# Altium PCB SiPMSensorPCB.PcbDoc
Units mil, origin at the board's own origin, x right, y up, seen from the top; angles counter-clockwise.
Board outline 6000 x 4000 mil, 2 copper layers (Top Layer, Bottom Layer); 19 components, 19 nets, 195 pads, 0 vias.
Unrouted connection lines stored in the file: 82.
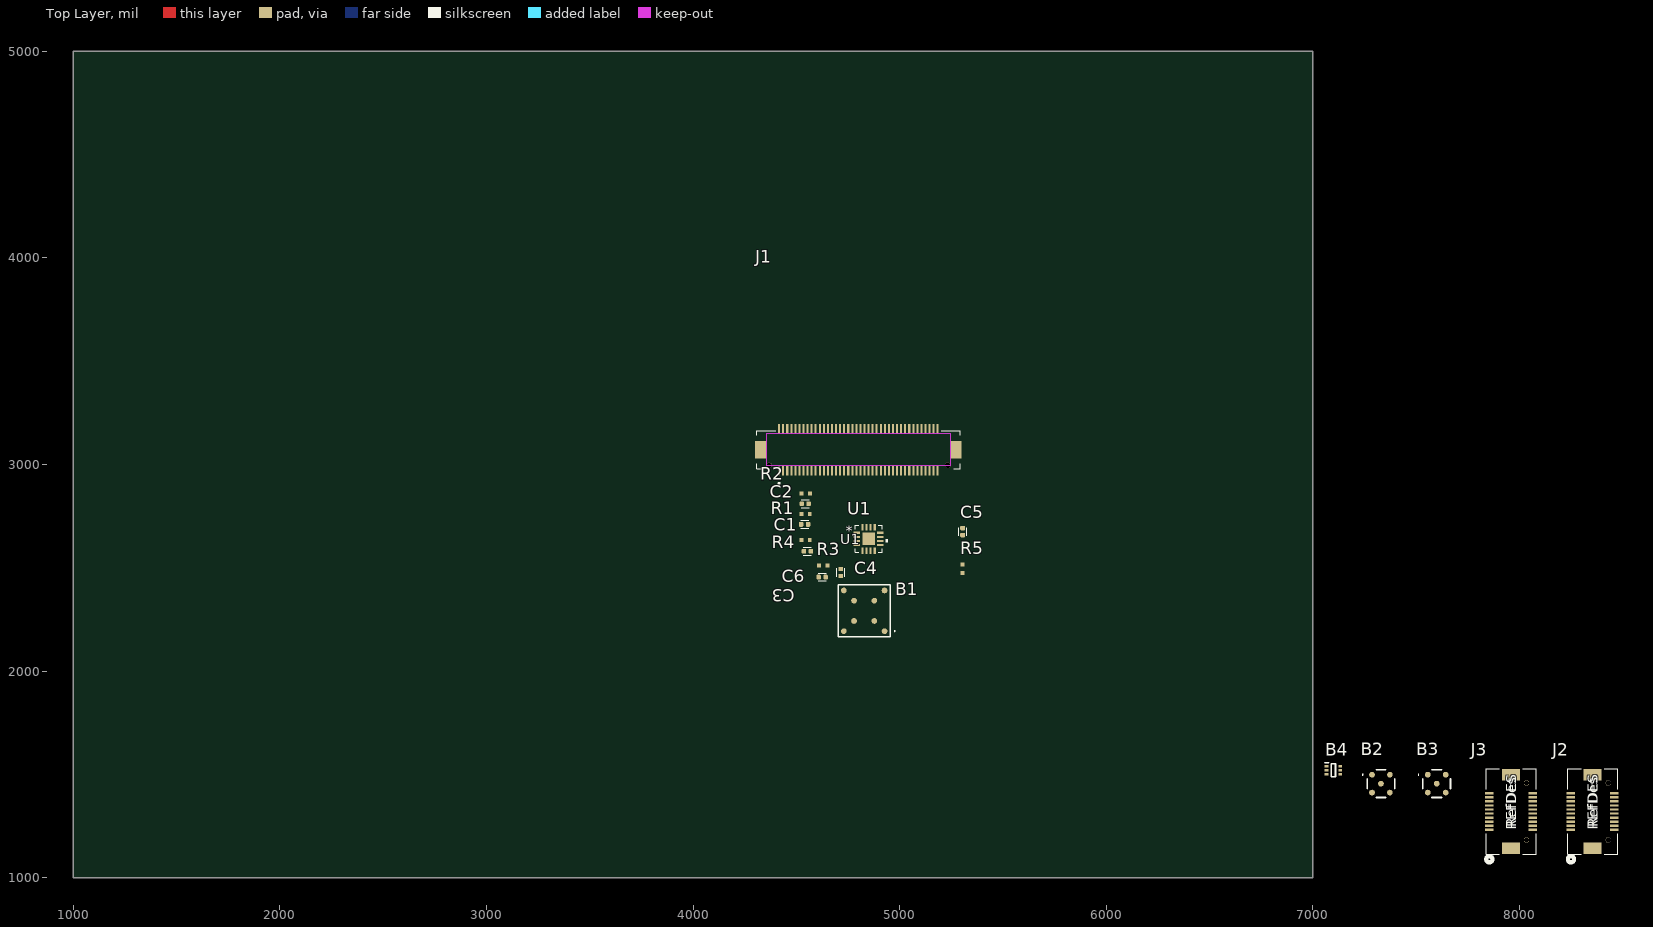
[diagram p0: Top Layer view]
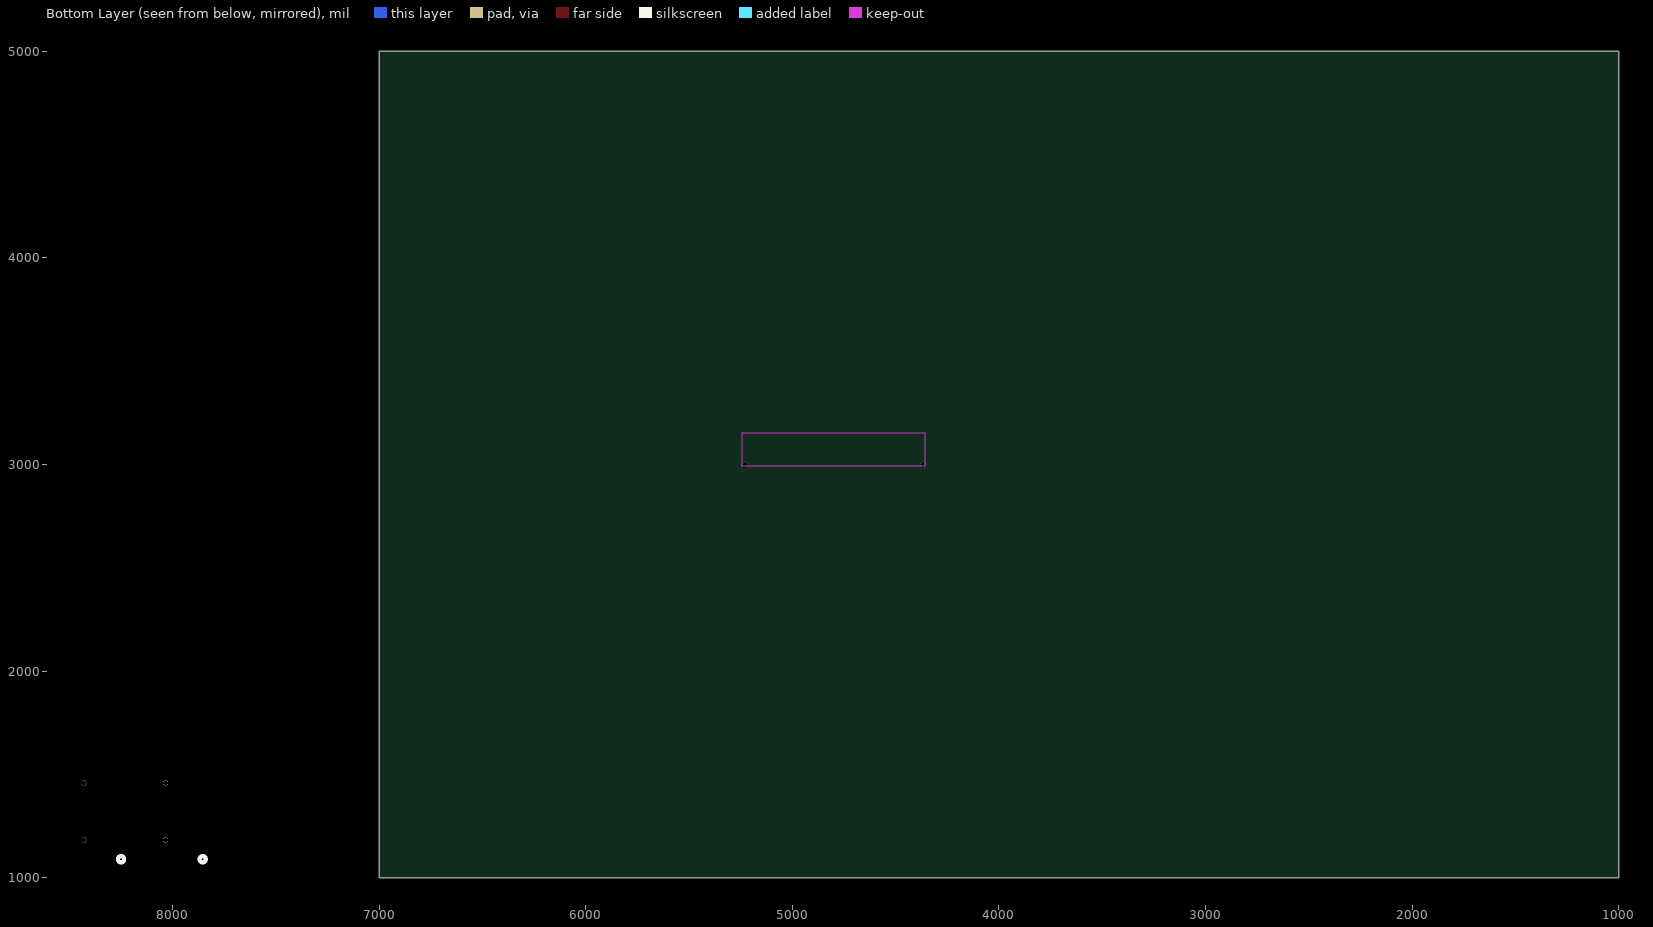
[diagram p1: Bottom Layer view, seen from below]

## Layer stack, top to bottom
Top Solder: solder mask 0.4, Solder Resist, Dk 3.5
Top Layer: signal copper 1.4
Dielectric 1: dielectric 12.6, FR-4, Dk 4.8
Bottom Layer: signal copper 1.4
Bottom Solder: solder mask 0.4, Solder Resist, Dk 3.5

## Board outline
1000,1000 7000,1000 7000,5000 1000,5000

## Design rules (kind name [scope] priority, off if disabled: settings)
Clearance [All] p1: gap=10 ignorepadtopadclearanceinfootprint=FALSE
PolygonConnect [All] p1: connectstyle=Relief reliefconductorwidth=10 reliefentries=4 polygonreliefangle="90 Angle" airgapwidth=10
RoutingVias [All] p1: holewidth=28 width=50 viastyle="Through Hole" minholewidth=28 minwidth=50 maxholewidth=28 maxwidth=50
SolderMaskExpansion [All] p1: expansion=4 istentingtop=FALSE
SupplyNets "Schematic Supply Nets_7" [InNet('SDA')] p1: voltage=0.000
SupplyNets "Schematic Supply Nets_6" [InNet('SCL')] p2: voltage=0.000
SupplyNets "Schematic Supply Nets_5" [InNet('VBR')] p3: voltage=0.000
SupplyNets "Schematic Supply Nets_4" [InNet('3V3')] p4: voltage=0.000
SupplyNets "Schematic Supply Nets_3" [InNet('VAN1')] p5: voltage=0.000
SupplyNets "Schematic Supply Nets_2" [InNet('VAN2')] p6: voltage=0.000
SupplyNets "Schematic Supply Nets_1" [InNet('VCC')] p7: voltage=0.000
SupplyNets "Schematic Supply Nets" [InNet('GND')] p8: voltage=0.000
Width [All] p1: maxlimit=10 minlimit=10 preferedwidth=10
30 further rules are at their usual default settings.

## Classes and differential pairs
component class SiPM_Array_v3: B2 B3 B4 J2 J3 R6 R7
component class SiPMSensor: B1 C1 C2 C3 C4 C5 C6 J1 R1 R2 R3 R4 R5 U1

## Components (designator, comment, footprint, x,y, rotation, side; value= is the part's Value field where it differs from the comment)
B1 "S14160-6050HS" S141606050HS 4828.43,2291.57 r180 top
B2 "S14160-3050HS" S141603050HS 7330,1455 r0 top
B3 "S14160-3050HS" S141603050HS 7600,1455 r0 top
B4 "TMP112AQDRLRQ1" SOTFL50P160X60-6N 7100,1520 r0 top
C1 "Capacitor" CAPC1005X55N 4540,2710 r180 top value=1p
C2 "Capacitor" CAPC1005X55N 4543.07,2810 r180 top value=1p
C3 "Capacitor" CAPC1005X55N 4625,2455 r180 top value=1p
C4 "Capacitor" CAPC1005X55N 4715,2476.93 r270 top value=1uF
C5 "Capacitor" CAPC1005X55N 5305,2675 r270 top value=1p
C6 "Capacitor" CAPC1005X55N 4553.07,2580 r0 top value=1p
J1 "DF17(1.0H)-80DP-0.5V(57)" HRS_DF17(1.0H)-80DP-0.5V(57) 4800.51,3071.38 r0 top
J2 "DF17(3.0)-20DS-0.5V(57)" CONN_DF173.0-20DS-0.5V57_HIR 8355,1320 r90 top
J3 "DF17(3.0)-20DS-0.5V(57)" CONN_DF173.0-20DS-0.5V57_HIR 7960,1320 r90 top
R1 "Resistor" RES_ERJU02J123X 4545,2760 r180 top value=1K
R2 "Resistor" RES_ERJU02J123X 4545.16,2860 r180 top value=1K
R3 "Resistor" RES_ERJU02J123X 4630,2510 r0 top value=1K
R4 "Resistor" RES_ERJU02J123X 4545,2635 r0 top value=1K
R5 "Resistor" RES_ERJU02J123X 5305,2495 r270 top value=1K
U1 "LTC6401IUD-26#TR" QFN-16_UD_LIT 4850,2640 r0 top

## Footprints (in the part's own frame and the unit in brackets; to place one, negate y for a bottom-side part, rotate by r counter-clockwise, add the part's x,y. Pads: shape width x height; smd on the part's side, far side on the other; paste and mask are expansions set on the pad)
CAPC1005X55N [mm]
  rrect53% 0.54x0.6 smd paste+0 mask+0.102: 1(-0.43,0) 2(0.43,0)
  silkscreen extent -0.5,-0.48 0.5,0.48, body extent -0.5,-0.25 0.5,0.25, height 0.55
CONN_DF173.0-20DS-0.5V57_HIR [mil]
  rect 11x41 smd paste+0 mask+0: 1(-88.58,105.31) 2(-88.58,-105.31) 3(-68.9,105.31) 4(-68.9,-105.31) 5(-49.21,105.31) 6(-49.21,-105.31) 7(-29.53,105.31) 8(-29.53,-105.31) 9(-9.84,105.31) 10(-9.84,-105.31) 11(9.84,105.31) 12(9.84,-105.31) 13(29.53,105.31) 14(29.53,-105.31) 15(49.21,105.31) 16(49.21,-105.31) 17(68.9,105.31) 18(68.9,-105.31) 19(88.58,105.31) 20(88.58,-105.31)
  rect 55x87 smd paste-43.5 mask-43.5: 21(-177.17,0) 22(177.17,0)
  round 26 / inner round 60 / far side round 26 hole 26 unplated paste-99999 mask+0: 23(-137.8,-74.8) 24(137.8,-74.8)
  silkscreen extent -246,-121 206,121
HRS_DF17(1.0H)-80DP-0.5V(57) [mm]
  rect 0.25x1.15 smd paste+0 mask+0.102: 1(-9.75,-2.575) 2(-9.75,2.575) 3(-9.25,-2.575) 4(-9.25,2.575) 5(-8.75,-2.575) 6(-8.75,2.575) 7(-8.25,-2.575) 8(-8.25,2.575) 9(-7.75,-2.575) 10(-7.75,2.575) 11(-7.25,-2.575) 12(-7.25,2.575) 13(-6.75,-2.575) 14(-6.75,2.575) 15(-6.25,-2.575) 16(-6.25,2.575) 17(-5.75,-2.575) 18(-5.75,2.575) 19(-5.25,-2.575) 20(-5.25,2.575) 21(-4.75,-2.575) 22(-4.75,2.575) 23(-4.25,-2.575) 24(-4.25,2.575) 25(-3.75,-2.575) 26(-3.75,2.575) 27(-3.25,-2.575) 28(-3.25,2.575) 29(-2.75,-2.575) 30(-2.75,2.575) 31(-2.25,-2.575) 32(-2.25,2.575) 33(-1.75,-2.575) 34(-1.75,2.575) 35(-1.25,-2.575) 36(-1.25,2.575) 37(-0.75,-2.575) 38(-0.75,2.575) 39(-0.25,-2.575) 40(-0.25,2.575) 41(0.25,-2.575) 42(0.25,2.575) 43(0.75,-2.575) 44(0.75,2.575) 45(1.25,-2.575) 46(1.25,2.575) 47(1.75,-2.575) 48(1.75,2.575) 49(2.25,-2.575) 50(2.25,2.575) 51(2.75,-2.575) 52(2.75,2.575) 53(3.25,-2.575) 54(3.25,2.575) 55(3.75,-2.575) 56(3.75,2.575) 57(4.25,-2.575) 58(4.25,2.575) 59(4.75,-2.575) 60(4.75,2.575) 61(5.25,-2.575) 62(5.25,2.575) 63(5.75,-2.575) 64(5.75,2.575) 65(6.25,-2.575) 66(6.25,2.575) 67(6.75,-2.575) 68(6.75,2.575) 69(7.25,-2.575) 70(7.25,2.575) 71(7.75,-2.575) 72(7.75,2.575) 73(8.25,-2.575) 74(8.25,2.575) 75(8.75,-2.575) 76(8.75,2.575) 77(9.25,-2.575) 78(9.25,2.575) 79(9.75,-2.575) 80(9.75,2.575)
  rect 1.4x2.1 smd paste+0 mask+0.102: S1(-12,0) S2(12,0)
  round 0.65 hole 0.65 unplated mask+0: ""(-11,-1.9) ""(11,-1.9)
  Keep-Out Layer region: 11.3,-2 -11.3,-2 -11.3,2 11.3,2
  silkscreen extent -12.5,-4.25 12.5,2.35, body extent -3.66,-2.78 2.04,22.22, height 3.14
QFN-16_UD_LIT [mm]
  rect 0.805x0.249 smd paste+0 mask+0: 1(-1.452,0.75) 2(-1.452,0.25) 3(-1.452,-0.25) 4(-1.452,-0.75) 9(1.452,-0.75) 10(1.452,-0.25) 11(1.452,0.25) 12(1.452,0.75)
  rect 0.249x0.805 smd paste+0 mask+0: 5(-0.75,-1.452) 6(-0.25,-1.452) 7(0.25,-1.452) 8(0.75,-1.452) 13(0.75,1.452) 14(0.25,1.452) 15(-0.25,1.452) 16(-0.75,1.452)
  rect 1.55x1.55 smd paste+0 mask+0: 17(0,0)
  silkscreen extent -1.68,-1.68 2.36,1.68, body extent -1.55,-1.55 1.55,1.55, height 0.8
RES_ERJU02J123X [mm]
  rect 0.475x0.5 smd: 1(-0.512,0) 2(0.512,0)
S141603050HS [mm]
  round 0.7 smd: A1(-1.1,1.1) A3(-1.1,-1.1) B2(0,0) C1(1.1,1.1) C3(1.1,-1.1)
  silkscreen extent -2.3,-1.7 1.7,1.7
S141606050HS [mm]
  round 0.7 smd: A1(-2.5,2.5) A4(-2.5,-2.5) B2(-1.25,1.25) B3(-1.25,-1.25) C2(1.25,1.25) C3(1.25,-1.25) D1(2.5,2.5) D4(2.5,-2.5)
  silkscreen extent -3.8,-3.2 3.2,3.2
SOTFL50P160X60-6N [mm]
  rect 0.475x0.3 smd: 1(-0.838,0.5) 2(-0.838,0) 3(-0.838,-0.5) 4(0.838,-0.5) 5(0.838,0) 6(0.838,0.5)
  silkscreen extent -1.07,-0.8 0.25,0.9

## Part data
B1: "S14160 Hamamatsu S14160-6050HS Low Breakdown voltage MPPC for scintillation detector", Manufacturer_Name=Hamamatsu, Datasheet Link=https://www.hamamatsu.com/content/dam/hamamatsu-photonics/sites/documents/99_SALES_LIBRARY/ssd/s14160_s14161_series_kapd1064e.pdf, Geometry.Height=1.55mm, Manufacturer_Part_Number=S14160-6050HS
B2 B3: "The S14160 series achieve higher PDE (photon detection efficiency) and lower operation voltage than other MPPC to adapt for PET and radiation monitor application.-Higher PDE: 50% at p, Vop=VBR + 2.7 V", Manufacturer_Name=Hamamatsu, Datasheet Link=https://www.hamamatsu.com/content/dam/hamamatsu-photonics/sites/documents/99_SALES_LIBRARY/ssd/s14160_s14161_series_kapd1064e.pdf, Geometry.Height=1.55mm, Manufacturer_Part_Number=S14160-3050HS
B4: "Automotive Grade, 1.4V-Capable +/-0.5C Temperature Sensor with Alert Function and I2C/SMBus", Manufacturer_Name="Texas Instruments", Mouser Part Number=595-TMP112AQDRLRQ1, Arrow Part Number=TMP112AQDRLRQ1, Arrow Price/Stock=https://www.arrow.com/en/products/tmp112aqdrlrq1/texas-instruments?utm_currency=USD&region=nac, Datasheet Link=http://www.ti.com/lit/gpn/tmp112-q1, Geometry.Height=0.6mm, Manufacturer_Part_Number=TMP112AQDRLRQ1, Mouser Price/Stock=https://www.mouser.co.uk/ProductDetail/Texas-Instruments/TMP112AQDRLRQ1?qs=asCBFxFfL1Q5YmJCm%252BGnCQ%3D%3D
J1: "80 Position Connector Header, Outer Shroud Contacts Surface Mount Gold", Package=None, Check_prices=https://www.snapeda.com/parts/DF17(1.0H)-80DP-0.5V(57)/Hirose/view-part/?ref=eda, MF="Hirose Electric", MP=DF17(1.0H)-80DP-0.5V(57), SnapEDA_Link=https://www.snapeda.com/parts/DF17(1.0H)-80DP-0.5V(57)/Hirose/view-part/?ref=snap
J2 J3: library part DF173.0-20DS-0.5V57, "Description", Manufacturer_Name=Hirose, Copyright="Copyright (C) 2025 Ultra Librarian. All rights reserved.", Manufacturer_Part_Number=DF17(3.0)-20DS-0.5V(57), RefDes=RefDes, Type=Type
U1: library part LTC6401IUD-26TR, "No Description Available", Manufacturer_Name="Analog Devices Inc", Copyright="Copyright (C) 2026 Ultra Librarian. All rights reserved.", Manufacturer_Part_Number=LTC6401IUD-26#TR, RefDes=RefDes, Type=Type
C1 C2 C3 C4 C5 C6: SimulationGenericComponent=True
R1 R2 R3 R4 R5: SimulationGenericComponent=True, TC1=0, TC2=0

## Nets (pads, with @x,y where several pads share a name; then routed paths per layer and width w, separated by ;. In a path a pad name is that pad's centre, name@x,y a point inside that pad or via, vN(x,y) a via of type N, cw(c..) or ccw(c..) an arc to the next point about the centre after c; other vN are vias at no path point)
3V3: B4.5 J2.7 J3.8 U1.1 U1.3 U1.10
ADCn: C2.1 J1.11 R1.2 R2.1
ADCp: C1.1 J1.9 R1.1 R5.2
Anode_1: B1.C3 C3.2 R3.2
Cathode_1: B1.D4 C5.2 R5.1
"Charge Pump": J1.1 R4.1
CP_Feed: C6.2 R3.1 R4.2
DAC: J1.7 R2.2
GND: B4.2 B4.3 B4.4 C1.2 C2.2 C4.2 C6.1 J1.13 J2.2 J2.4 J2.6 J2.8 J2.10 J2.12 J2.13 J2.14 J2.15 J2.16 J2.17 J2.18 J2.19 J2.20 J3.1 J3.3 J3.5 J3.7 J3.9 J3.11 J3.13 J3.14 J3.15 J3.16 J3.17 J3.18 J3.19 J3.20 U1.4 U1.9 U1.11 U1.12
NetC3_1: C3.1 U1.15 U1.16
NetC5_1: C5.1 U1.13 U1.14
OUT+: J1.5 U1.8
OUT-: J1.3 U1.5
SCL: B4.1 J3.12
SDA: B4.6 J2.11
VAN1: B2.B2 J2.9
VAN2: B3.B2 J3.10
VBR: B2.A1 B2.A3 B2.C1 B2.C3 B3.A1 B3.A3 B3.C1 B3.C3 J2.1 J2.3 J2.5 J3.2 J3.4 J3.6
VOCM: C4.1 U1.2
pads on no net: B1.A1 B1.A4 B1.B2 B1.B3 B1.C2 B1.D1 J1. J1.2 J1.4 J1.6 J1.8 J1.10 J1.12 J1.14 J1.15 J1.16 J1.17 J1.18 J1.19 J1.20 J1.21 J1.22 J1.23 J1.24 J1.25 J1.26 J1.27 J1.28 J1.29 J1.30 J1.31 J1.32 J1.33 J1.34 J1.35 J1.36 J1.37 J1.38 J1.39 J1.40 J1.41 J1.42 J1.43 J1.44 J1.45 J1.46 J1.47 J1.48 J1.49 J1.50 J1.51 J1.52 J1.53 J1.54 J1.55 J1.56 J1.57 J1.58 J1.59 J1.60 J1.61 J1.62 J1.63 J1.64 J1.65 J1.66 J1.67 J1.68 J1.69 J1.70 J1.71 J1.72 J1.73 J1.74 J1.75 J1.76 J1.77 J1.78 J1.79 J1.80 J1.S1 J1.S2 J2.21 J2.22 J2.23 J2.24 J3.21 J3.22 J3.23 J3.24 U1.6 U1.7 U1.17

## Text inside footprints (layer, text, board x,y; h text height)
J2: Top Overlay "REFDES" at 8380,1232.5 h50 r90; Top Overlay "RefDes" at 8380,1245 h50 r90; Mechanical 13 "RefDes2" at 8380,1232.5 h50 r90
J3: Top Overlay "REFDES" at 7985,1232.5 h50 r90; Top Overlay "RefDes" at 7985,1245 h50 r90; Mechanical 13 "RefDes2" at 7985,1232.5 h50 r90
U1: Top Overlay "*" at 4739.48,2654.37 h50; Mechanical 13 "*" at 4796.16,2654.37 h50